# Altium PCB PCB1.PcbDoc
Units mm, origin at the board's own origin, x right, y up, seen from the top; angles counter-clockwise.
Board outline 39.8 x 37.8 mm, 4 copper layers (Top Layer, Int1 (GND), Int2 (PWR), Bottom Layer), stack 1.586 mm thick; 2 components, 0 nets, 12 pads, 0 vias.
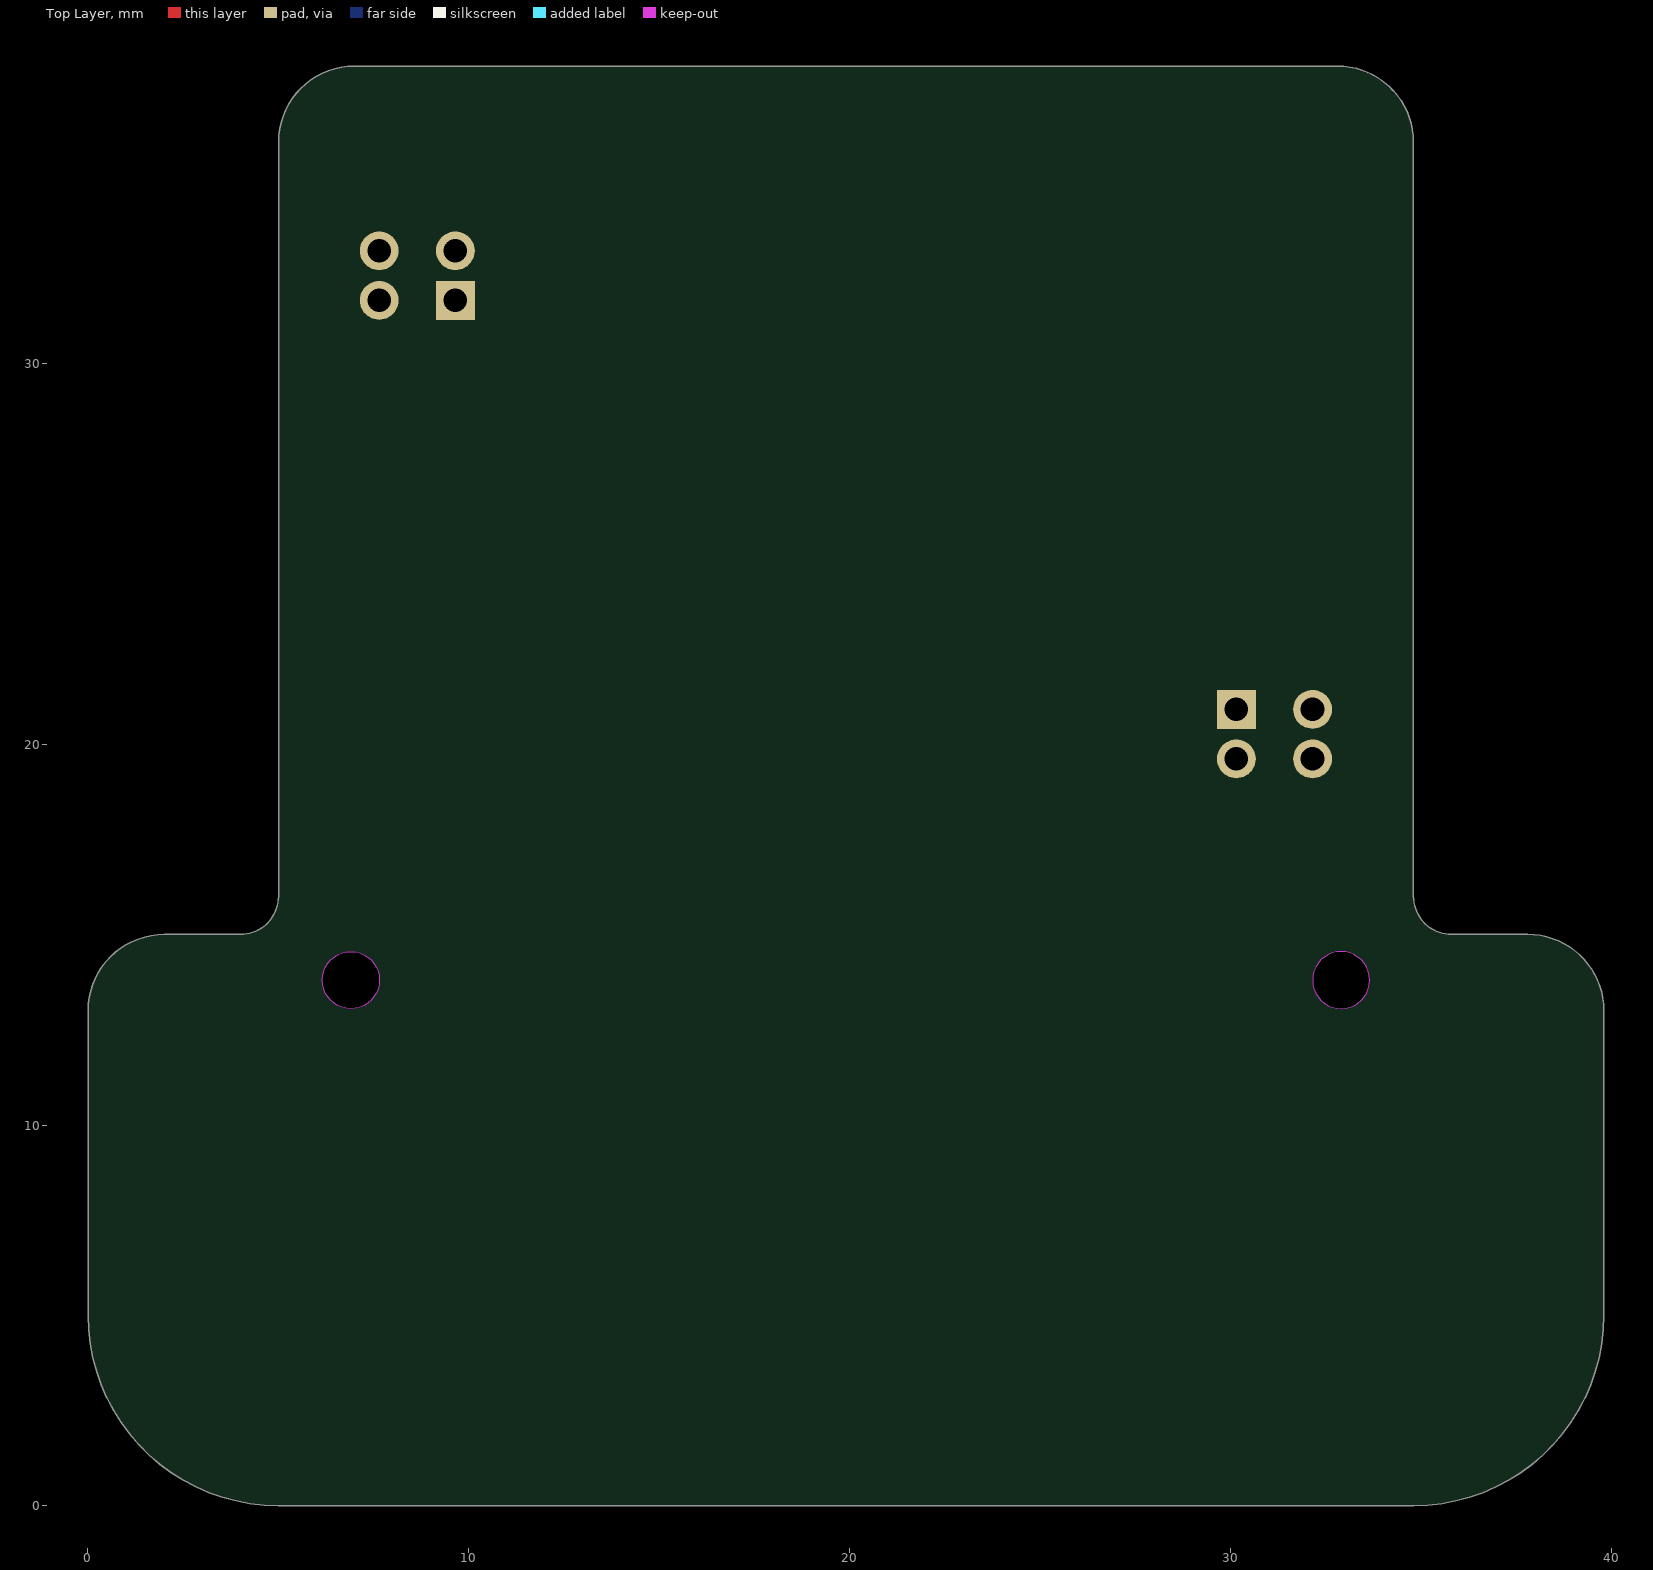
[diagram p0: Top Layer view]
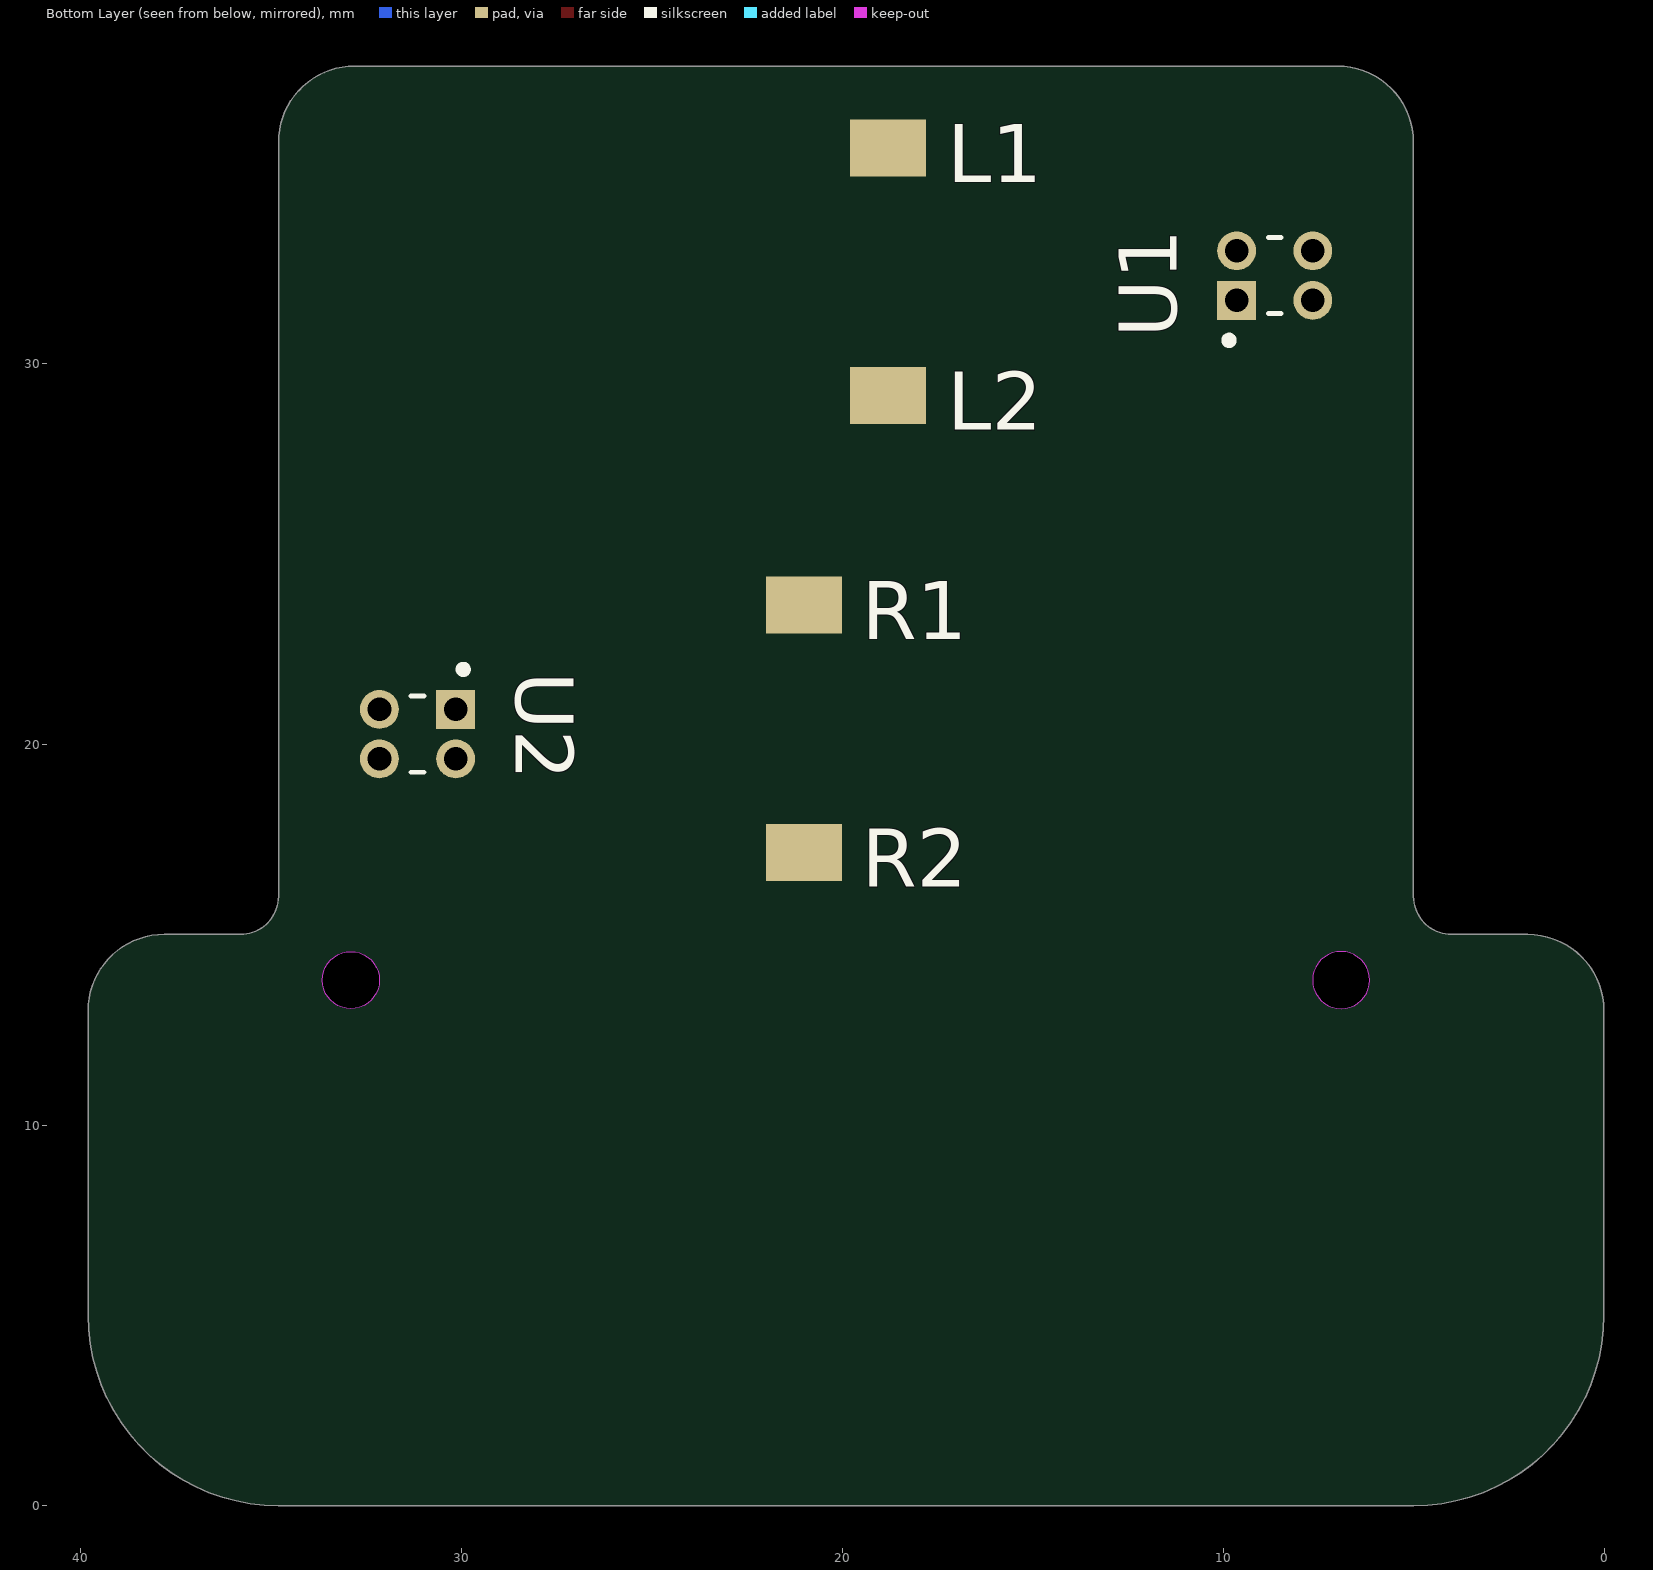
[diagram p1: Bottom Layer view, seen from below]

## Layer stack, top to bottom
Top Solder: solder mask 0.0152, SM-001, Dk 3.8
Top Layer: signal copper 0.035
Dielectric 1: prepreg 0.2104, PP-017, Dk 4.5
Int1 (GND): signal copper 0.0152
Dielectric 2: core 1.065, Core-039, Dk 4.48
Int2 (PWR): signal copper 0.0152
Dielectric 3: prepreg 0.2104, PP-017, Dk 4.5
Bottom Layer: signal copper 0.035
Bottom Solder: solder mask 0.0152, SM-001, Dk 3.8

## Board outline
0.006,5.006 0.006,13.006 cw(c2.006,13.006) 2.006,15.006 4.006,15.006 ccw(c4.006,16.006) 5.006,16.006 5.006,35.806 cw(c7.006,35.806) 7.006,37.806 32.806,37.806 cw(c32.806,35.806) 34.806,35.806 34.806,16.006 ccw(c35.806,16.006) 35.806,15.006 37.806,15.006 cw(c37.806,13.006) 39.806,13.006 39.806,5.006 cw(c34.806,5.006) 34.806,0.006 5.006,0.006 cw(c5.006,5.006)
cut-out: 32.156,13.806 ccw(c32.906,13.806) 32.906,13.056 ccw(c32.906,13.806) 33.656,13.806 ccw(c32.906,13.806) 32.906,14.556 ccw(c32.906,13.806)
cut-out: 6.906,13.056 cw(c6.906,13.806) 6.156,13.806 cw(c6.906,13.806) 6.906,14.556 cw(c6.906,13.806) 7.656,13.806 cw(c6.906,13.806)

## Design rules (kind name [scope] priority, off if disabled: settings)
BoardOutlineClearance [All] p1: gap=0.2 ignorepadtopadclearanceinfootprint=FALSE except(0.4: Arc-SplitBarrior Arc-SplitContinuation Track-SplitBarrior Track-SplitContinuation SMDPad-SplitBarrior SMDPad-SplitContinuation THPad-SplitBarrior THPad-SplitContinuation Via-SplitBarrior Via-SplitContinuation Fill-SplitBarrior Fill-SplitContinuation Poly-SplitBarrior Poly-SplitContinuation Region-SplitBarrior Region-SplitContinuation Text-SplitBarrior Text-SplitContinuation)
Clearance [All] p1: gap=0.2 ignorepadtopadclearanceinfootprint=FALSE except(0: Arc-Text Track-Text SMDPad-Text THPad-Text Via-Text Fill-Text Poly-Text Region-Text Text-Text; 0.089: Arc-Arc Arc-Track Arc-SMDPad Track-Track Track-SMDPad SMDPad-SMDPad; 0.127: Arc-Via Track-Via SMDPad-Via THPad-Via Via-Via)
HoleSize [All] p1: absolutevalues=TRUE maxlimit=6.3 minlimit=0.2 maxpercent=80.000 minpercent=20.000
MinimumAnnularRing [All] p1: minimumring=0.076
MinimumSolderMaskSliver [All] p1: minsoldermaskwidth=0.1
PlaneClearance [All] p1: clearance=0.127
PlaneConnect [All] p1: pad.planeconnectstyle=Relief pad.reliefexpansion=0.127 pad.reliefentries=4 pad.reliefconductorwidth=0.127 pad.reliefairgap=0.127 via.planeconnectstyle=Direct via.reliefexpansion=0.508 via.reliefentries=4 via.reliefconductorwidth=0.254 via.reliefairgap=0.254
PolygonConnect [All] p1: thpad.connectstyle=Relief thpad.reliefconductorwidth=0.127 thpad.reliefentries=4 thpad.polygonreliefangle="45 Angle" thpad.airgapwidth=0.127 smdpad.connectstyle=Relief smdpad.reliefconductorwidth=0.127 smdpad.reliefentries=4 smdpad.polygonreliefangle="90 Angle" smdpad.airgapwidth=0.127 via.connectstyle=Direct via.reliefconductorwidth=0.254 via.reliefentries=4 via.polygonreliefangle="90 Angle" via.airgapwidth=0.254
RoutingVias [All] p1: holewidth=0.2 width=0.3 viastyle="Through Hole" minholewidth=0.2 minwidth=0.3 maxholewidth=1 maxwidth=2
SilkToSilkClearance [All] p1: silktosilkclearance=0.15
SilkToSolderMaskClearance [IsPad] p1: minsilkscreentomaskgap=0.15 clearancetoexposedcopper=TRUE
SolderMaskExpansion [All] p1: expansion=0.102 istentingtop=FALSE
Width [All] p1: maxlimit=2.54 minlimit=0.089 preferedwidth=0.089
24 further rules are at their usual default settings.

## Components (designator, comment, footprint, x,y, rotation, side; value= is the part's Value field where it differs from the comment)
U1 "GP1S196HCZ0F" OPTO_GP1S196HCZ0F 8.65,32.306 r90 bottom locked
U2 "GP1S196HCZ0F" OPTO_GP1S196HCZ0F 31.156,20.266 r270 bottom locked

## Footprints (in the part's own frame and the unit in brackets; to place one, negate y for a bottom-side part, rotate by r counter-clockwise, add the part's x,y. Pads: shape width x height; smd on the part's side, far side on the other; paste and mask are expansions set on the pad)
OPTO_GP1S196HCZ0F [mm]
  rect 1.02x1.02 hole 0.62: 1(-0.65,1)
  round 1.02 hole 0.62: 2(-0.65,-1) 3(0.65,-1) 4(0.65,1)
  silkscreen extent -1.8,-0.17 1,1.3, body extent -1,-1.55 1,1.55, height 2.7

## Part data
U1 U2: "Optical Sensor Through-Beam 0.043 (1.1mm) Phototransistor PCB Mount", Package="PCB Mount Sharp", Availability=Warning, Check_prices=https://www.snapeda.com/parts/GP1S196HCZ0F/Sharp%20Microelectronics/view-part/2699849/?ref=eda, MF="Sharp Microelectronics", MP=GP1S196HCZ0F, Price=None, Purchase-URL=https://pricing.snapeda.com/search/part/GP1S196HCZ0F/?ref=eda, SnapEDA_Link=https://www.snapeda.com/parts/GP1S196HCZ0F/Sharp%20Microelectronics/view-part/2699849/?ref=snap

## Free pads (board coordinates)
  rect 2x1.5 smd far side: 1(18.806,35.656) 2(18.806,29.156) 3(21.006,23.656) 4(21.006,17.156)

## Nets (pads, with @x,y where several pads share a name; then routed paths per layer and width w, separated by ;. In a path a pad name is that pad's centre, name@x,y a point inside that pad or via, vN(x,y) a via of type N, cw(c..) or ccw(c..) an arc to the next point about the centre after c; other vN are vias at no path point)
pads on no net: U1.1 U1.2 U1.3 U1.4 U2.1 U2.2 U2.3 U2.4

## Silkscreen, mask and mechanical layers (free items; w line width, h text height)
Bottom Overlay:
  text "L1" at 17.246,34.754 h1.52
  text "L2" at 17.246,28.254 h1.52
  text "R1" at 19.496,22.754 h1.52
  text "R2" at 19.496,16.254 h1.52
Mechanical 1:
  circle w0.013: c6.906,13.806 r0.75
  circle w0.013: c32.906,13.806 r0.75
  lines w0.013: 0.006,5.006 ccw(c5.006,5.006) 5.006,0.006 34.806,0.006 ccw(c34.806,5.006) 39.806,5.006 39.806,13.006 ccw(c37.806,13.006) 37.806,15.006 35.806,15.006 cw(c35.806,16.006) 34.806,16.006 34.806,35.806 ccw(c32.806,35.806) 32.806,37.806 7.006,37.806 ccw(c7.006,35.806) 5.006,35.806 5.006,16.006 cw(c4.006,16.006) 4.006,15.006 2.006,15.006 ccw(c2.006,13.006) 0.006,13.006 0.006,5.006